# EAGLE board lul (EAGLE 8.2.2)
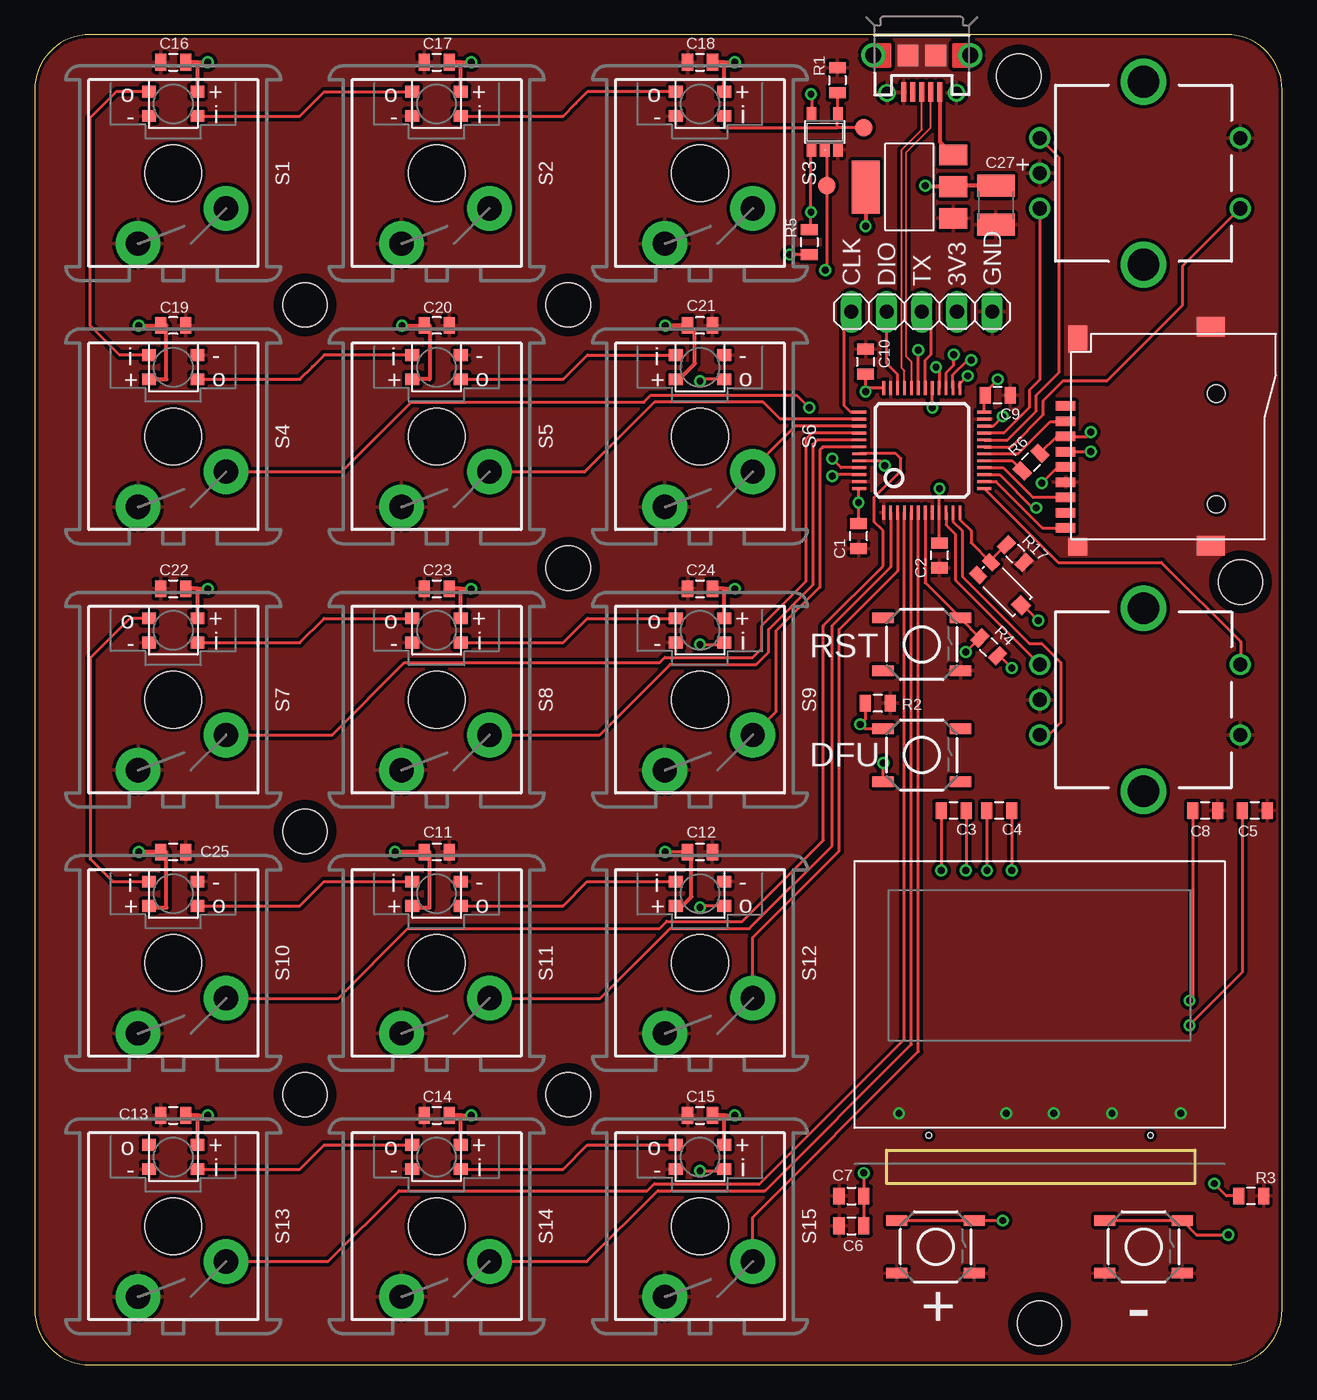
[diagram p0: board, top side]
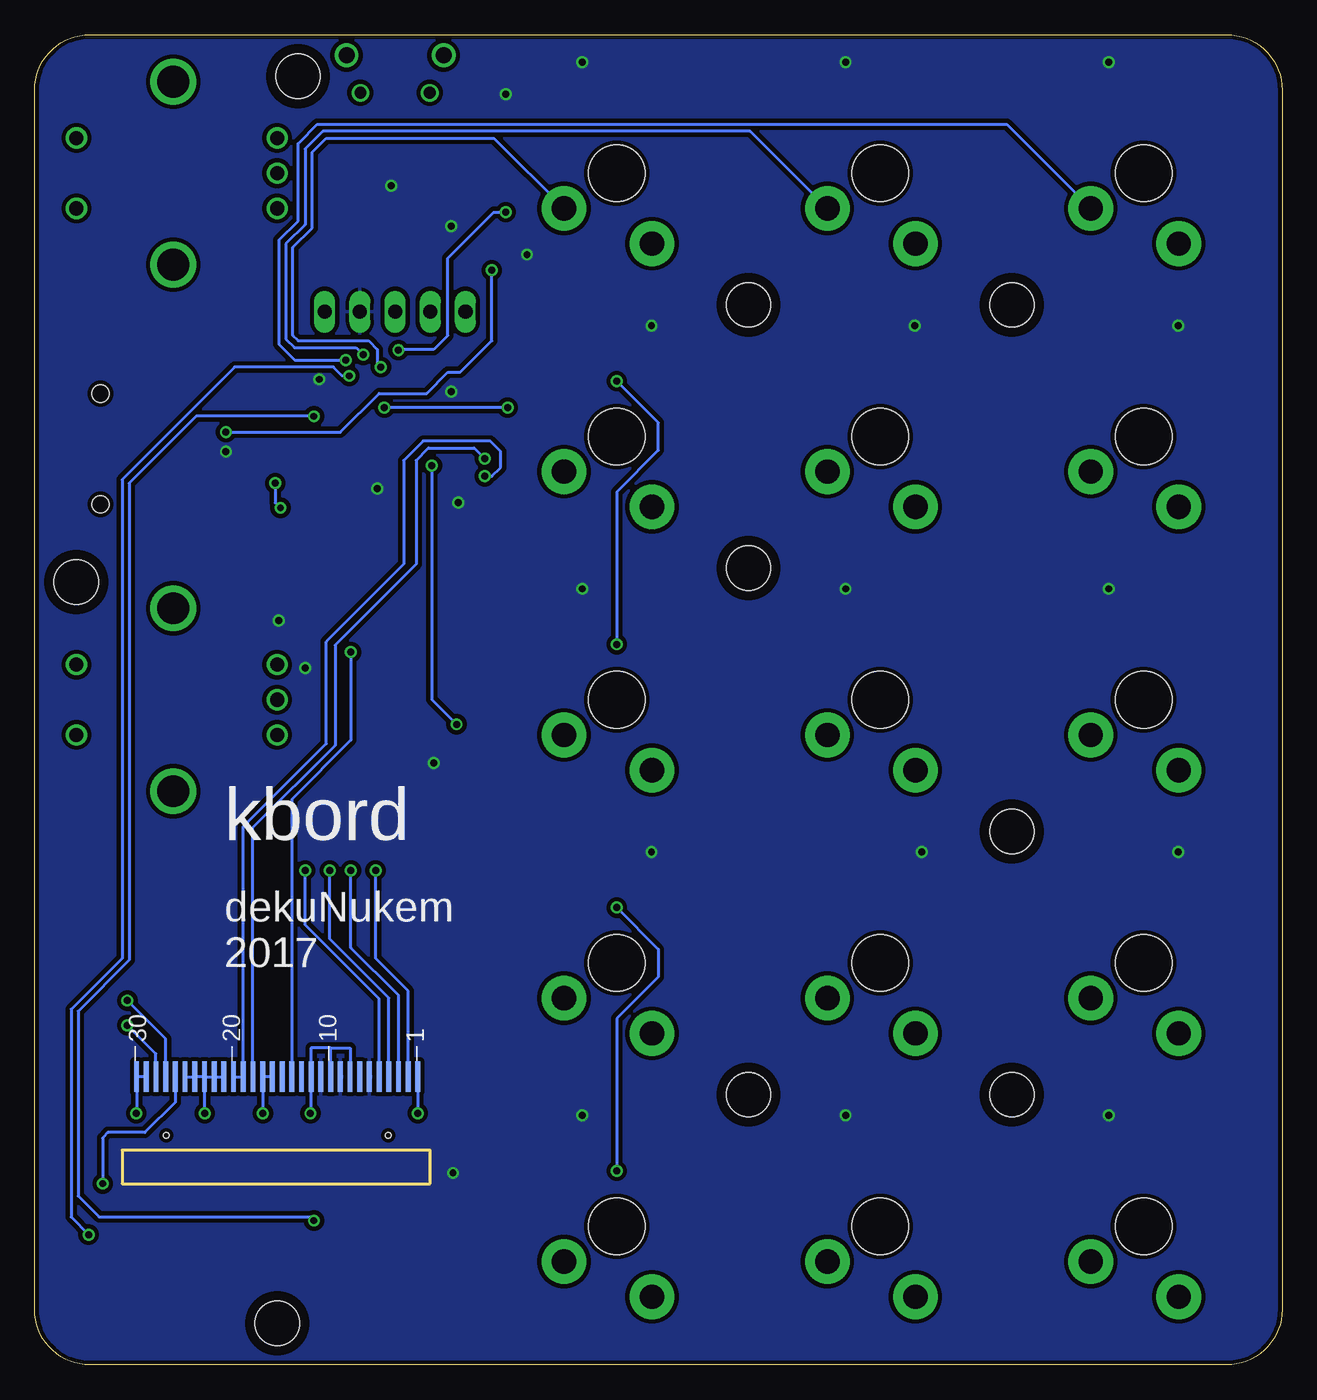
[diagram p1: board, bottom side, seen from below]

Size 90 x 96 mm. Coordinates in mm from the lower left corner, seen from the top.
Outline: 0,92 0,4 arc90 4,0 86,0 arc90 90,4 90,92 arc90 86,96 4,96 arc90 0,92
Copper layers (1*16): Top 0.035mm / dielectric 1.5mm / Bottom 0.035mm
Design rules "SparkFun-2-layer-TIGHT": minimum track width 7mil, minimum drill 15mil, track to track 7mil, track to pad 7mil, pad to pad 7mil, via to via 7mil, smd to smd 7mil, copper to edge 7mil, drill to drill 7mil, minimum pad ring 7mil, minimum via ring 7mil, stop-mask expansion 4mil, vias tented up to drill 25mil, thermal gap 10mil
Milling: area 61.5,13.1 to 83.7,15.5

## Footprints (pad centres in the part's own frame; a part is rotated, then mirrored left to right if it is on the bottom)
0805@1 = smd 0.8 x 1.2: 1 -0.9,0; 2 0.9,0
C1210 = smd 1.6 x 2.7: 1 -1.4,0; 2 1.4,0
TQFP48 = smd 0.2 x 1: 1 -2.75,-4.5; 2 -2.25,-4.5; 3 -1.75,-4.5; 4 -1.25,-4.5; 5 -0.75,-4.5; 6 -0.25,-4.5; 7 0.25,-4.5; 8 0.75,-4.5; 9 1.25,-4.5; 10 1.75,-4.5; 11 2.25,-4.5; 12 2.75,-4.5; 25 2.75,4.5; 26 2.25,4.5; 27 1.75,4.5; 28 1.25,4.5; 29 0.75,4.5; 30 0.25,4.5; 31 -0.25,4.5; 32 -0.75,4.5; 33 -1.25,4.5; 34 -1.75,4.5; 35 -2.25,4.5; 36 -2.75,4.5 | smd 1 x 0.2: 13 4.5,-2.75; 14 4.5,-2.25; 15 4.5,-1.75; 16 4.5,-1.25; 17 4.5,-0.75; 18 4.5,-0.25; 19 4.5,0.25; 20 4.5,0.75; 21 4.5,1.25; 22 4.5,1.75; 23 4.5,2.25; 24 4.5,2.75; 37 -4.5,2.75; 38 -4.5,2.25; 39 -4.5,1.75; 40 -4.5,1.25; 41 -4.5,0.75; 42 -4.5,0.25; 43 -4.5,-0.25; 44 -4.5,-0.75; 45 -4.5,-1.25; 46 -4.5,-1.75; 47 -4.5,-2.25; 48 -4.5,-2.75
SOT223 = smd 1.499 x 2.007: 1 -2.261,-3.15; 2 0.025,-3.15; 3 2.311,-3.15 | smd 3.81 x 2.007: 4 0,3.15
SOT23-5 = smd 0.69 x 0.99: 1 -0.95,-1.29; 2 0,-1.29; 3 0.95,-1.29; 4 0.95,1.3; 5 -0.95,1.3
1X05 = drill 1.016 long: 1 -5.08,0; 2 -2.54,0; 3 0,0; 4 2.54,0; 5 5.08,0
LED3535 = smd 1 x 0.85: 1 -1.75,0.875; 2 -1.75,-0.875; 3 1.75,-0.875; 4 1.75,0.875
0805 = smd 0.8 x 1.2: 1 -0.9,0; 2 0.9,0
CHERRY-MX-LED = drill 1.753 pad 3.226: S1 -3.81,2.54; S2 2.54,5.08 | hole 4.089: 0,0
ROTARY_ENC_PLAIN = drill 1.016: A 7.493,-2.54; B 7.493,2.54; C 7.493,0; SW+ -6.985,2.54; SW- -6.985,-2.54 | drill 2.286: P$3 0,6.604; P$4 0,-6.604
TACTILE-SWITCH-SMD = smd 1.524 x 0.762: 1 -2.794,1.905; 2 2.794,1.905; 3 -2.794,-1.905; 4 2.794,-1.905
TF-PULL = smd 0.7 x 1.4: 1 -2.2,-7.62; 2 -1.1,-7.62; 3 0,-7.62; 4 1.1,-7.62; 5 2.2,-7.62; 6 3.3,-7.62; 7 4.4,-7.62; 8 5.5,-7.62; 9 6.6,-7.62 | smd 1.4 x 2: S1 -7.9,2.85; S2 7.9,2.85 | smd 1.28 x 1.4: S3 7.96,-6.75 | smd 1.95 x 1.4: S4 -7.025,-6.75 | hole 1.25: -3.1,3.25; 4.9,3.25
PAD.03X.05 = smd 1.27 x 1.27: P$1 0,0
UG-2864HSWEG01_0.96IN_WRAPAROUND = smd 0.35 x 2.2 bottom: 1 -10.15,-1.2; 2 -9.45,-1.2; 3 -8.75,-1.2; 4 -8.05,-1.2; 5 -7.35,-1.2; 6 -6.65,-1.2; 7 -5.95,-1.2; 8 -5.25,-1.2; 9 -4.55,-1.2; 10 -3.85,-1.2; 11 -3.15,-1.2; 12 -2.45,-1.2; 13 -1.75,-1.2; 14 -1.05,-1.2; 15 -0.35,-1.2; 16 0.35,-1.2; 17 1.05,-1.2; 18 1.75,-1.2; 19 2.45,-1.2; 20 3.15,-1.2; 21 3.85,-1.2; 22 4.55,-1.2; 23 5.25,-1.2; 24 5.95,-1.2; 25 6.65,-1.2; 26 7.35,-1.2; 27 8.05,-1.2; 28 8.75,-1.2; 29 9.45,-1.2; 30 10.15,-1.2 | hole 0.4: -8,-5.45; 8,-5.45
M3_MOUNTING_HOLE_PACK = hole 3.2: 0,0
TEMT6000-SEN = smd 1.1 x 0.8: BASE -1.87,-0.65; EMITTER -1.87,0.65 | smd 1.1 x 1: COLLECTOR 1.86,0.01
USB-MICROB = smd 0.35 x 1.4: D+ 0,2.65; D- -0.65,2.65; GND 1.3,2.65; ID 0.65,2.65; VBUS -1.3,2.65 | smd 1.5 x 1.55: P1 -1,0; P2 1,0 | drill 1.15 pad 1.422: P3 -3.5,0; P4 3.5,0 | drill 0.85 pad 1.27: P5 -2.5,2.7; P6 2.5,2.7

## Placement (x,y rotation side)
C1  0.1uF  [0805@1]  59.44,59.82 90 top
C2  0.1uF  [0805@1]  65.28,58.42 90 top
C3  2.2uF  [0805@1]  66.29,40.01 180 top
C4  2.2uF  [0805@1]  69.6,40.01 180 top
C5  10uF  [0805@1]  88.01,40.01 180 top
C6  2.2uF  [0805@1]  58.93,10.03 0 top
C7  2.2uF  [0805@1]  58.93,12.19 0 top
C8  2.2uF/16V  [0805@1]  84.45,40.01 180 top
C9  0.1uF  [0805@1]  69.47,69.98 180 top
C10  0.1uF  [0805@1]  59.94,72.39 270 top
C11  0.1uF  [0805@1]  29,37.01 180 top
C12  0.1uF  [0805@1]  48,37.01 180 top
C13  0.1uF  [0805@1]  10,18.01 0 top
C14  0.1uF  [0805@1]  29,18.01 0 top
C15  0.1uF  [0805@1]  48,18.01 0 top
C16  0.1uF  [0805@1]  10,94.01 0 top
C17  0.1uF  [0805@1]  29,94.01 0 top
C18  0.1uF  [0805@1]  48,94.01 0 top
C19  0.1uF  [0805@1]  10,75.01 180 top
C20  0.1uF  [0805@1]  29,75.01 180 top
C21  0.1uF  [0805@1]  48,75.01 180 top
C22  0.1uF  [0805@1]  10,56.01 0 top
C23  0.1uF  [0805@1]  29,56.01 0 top
C24  0.1uF  [0805@1]  48,56.01 0 top
C25  0.1uF  [0805@1]  10,37.01 180 top
C27  [C1210]  69.34,83.69 270 top
IC1  STM32F072C8T6  [TQFP48]  64,66 0 top
IC2  REG1117  [SOT223]  63.11,85 90 top
IC3  74LVC1G125DBV  [SOT23-5]  57,88.98 0 top
JP1  [1X05]  64,76 0 top
LED1  WS2812B3535  [LED3535]  10,91 180 top
LED2  WS2812B3535  [LED3535]  29,91 180 top
LED3  WS2812B3535  [LED3535]  48,91 180 top
LED4  WS2812B3535  [LED3535]  10,72 0 top
LED5  WS2812B3535  [LED3535]  29,72 0 top
LED6  WS2812B3535  [LED3535]  48,72 0 top
LED7  WS2812B3535  [LED3535]  10,53 180 top
LED8  WS2812B3535  [LED3535]  29,53 180 top
LED9  WS2812B3535  [LED3535]  48,53 180 top
LED10  WS2812B3535  [LED3535]  10,34 0 top
LED11  WS2812B3535  [LED3535]  29,34 0 top
LED12  WS2812B3535  [LED3535]  48,34 0 top
LED13  WS2812B3535  [LED3535]  10,15 180 top
LED14  WS2812B3535  [LED3535]  29,15 180 top
LED15  WS2812B3535  [LED3535]  48,15 180 top
R1  10k  [0805]  57.91,92.71 270 top
R2  10k  [0805]  60.83,47.75 180 top
R3  390K  [0805]  87.76,12.19 180 top
R4  10k  [0805]  68.83,51.82 315 top
R5  10k  [0805]  55.88,81.03 270 top
R6  300  [0805]  71.88,65.15 45 top
R17  [0805]  70.74,58.55 135 top
S1  MOMENTARY-SWITCH-SPST-LED-PTH-CHERRY  [CHERRY-MX-LED]  10,86 180 top
S2  MOMENTARY-SWITCH-SPST-LED-PTH-CHERRY  [CHERRY-MX-LED]  29,86 180 top
S3  MOMENTARY-SWITCH-SPST-LED-PTH-CHERRY  [CHERRY-MX-LED]  48,86 180 top
S4  MOMENTARY-SWITCH-SPST-LED-PTH-CHERRY  [CHERRY-MX-LED]  10,67 180 top
S5  MOMENTARY-SWITCH-SPST-LED-PTH-CHERRY  [CHERRY-MX-LED]  29,67 180 top
S6  MOMENTARY-SWITCH-SPST-LED-PTH-CHERRY  [CHERRY-MX-LED]  48,67 180 top
S7  MOMENTARY-SWITCH-SPST-LED-PTH-CHERRY  [CHERRY-MX-LED]  10,48 180 top
S8  MOMENTARY-SWITCH-SPST-LED-PTH-CHERRY  [CHERRY-MX-LED]  29,48 180 top
S9  MOMENTARY-SWITCH-SPST-LED-PTH-CHERRY  [CHERRY-MX-LED]  48,48 180 top
S10  MOMENTARY-SWITCH-SPST-LED-PTH-CHERRY  [CHERRY-MX-LED]  10,29 180 top
S11  MOMENTARY-SWITCH-SPST-LED-PTH-CHERRY  [CHERRY-MX-LED]  29,29 180 top
S12  MOMENTARY-SWITCH-SPST-LED-PTH-CHERRY  [CHERRY-MX-LED]  48,29 180 top
S13  MOMENTARY-SWITCH-SPST-LED-PTH-CHERRY  [CHERRY-MX-LED]  10,10 180 top
S14  MOMENTARY-SWITCH-SPST-LED-PTH-CHERRY  [CHERRY-MX-LED]  29,10 180 top
S15  MOMENTARY-SWITCH-SPST-LED-PTH-CHERRY  [CHERRY-MX-LED]  48,10 180 top
S16  ENCODER-SWITCH  [ROTARY_ENC_PLAIN]  80,48 180 top
S17  ENCODER-SWITCH  [ROTARY_ENC_PLAIN]  80,86 180 top
S19  TAC_SWITCHSMD  [TACTILE-SWITCH-SMD]  80,8.52 0 top
S20  TAC_SWITCHSMD  [TACTILE-SWITCH-SMD]  65,8.52 0 top
S21  TAC_SWITCHSMD  [TACTILE-SWITCH-SMD]  64,52 0 top
S22  TAC_SWITCHSMD  [TACTILE-SWITCH-SMD]  64,44 0 top
SD1  TF-HOLDER  [TF-PULL]  82,67 270 top
TP1  TEST-POINT3X5  [PAD.03X.05]  59.82,89.28 90 top
TP2  TEST-POINT3X5  [PAD.03X.05]  57.15,85.09 0 top
U1  UG-2864HSWEG01  [UG-2864HSWEG01_0.96IN_WRAPAROUND]  72.5,22 0 top
U$7  M3_MOUNTING_HOLE  [M3_MOUNTING_HOLE_PACK]  19.5,19.5 0 top
U$8  TEMT6000  [TEMT6000-SEN]  69.85,56.13 315 top
U$9  M3_MOUNTING_HOLE  [M3_MOUNTING_HOLE_PACK]  87,56.5 0 top
U$10  M3_MOUNTING_HOLE  [M3_MOUNTING_HOLE_PACK]  71,93 0 top
U$11  M3_MOUNTING_HOLE  [M3_MOUNTING_HOLE_PACK]  19.5,76.5 0 top
U$12  M3_MOUNTING_HOLE  [M3_MOUNTING_HOLE_PACK]  38.5,19.5 0 top
U$13  M3_MOUNTING_HOLE  [M3_MOUNTING_HOLE_PACK]  38.5,76.5 0 top
U$14  M3_MOUNTING_HOLE  [M3_MOUNTING_HOLE_PACK]  72.5,3 0 top
U$15  M3_MOUNTING_HOLE  [M3_MOUNTING_HOLE_PACK]  38.5,57.5 0 top
U$16  M3_MOUNTING_HOLE  [M3_MOUNTING_HOLE_PACK]  19.5,38.5 0 top
X1  USB-MICROB  [USB-MICROB]  64,94.5 180 top

## Library data of the parts
C1-C25 C27 IC1 R1-R6 R17 SD1 TP1 TP2 U$7 U$9-U$16 = clock
IC2 = clock; MPN: REG1117; OC_FARNELL: 1097566; OC_NEWARK: 14P6981
IC3 = 74xx-little-de
JP1 = pinhead
LED1-LED15 U1 = lul
S1-S15 = lul; SF_ID: COM-13834
S16 S17 = SparkFun-Switches; SF_SKU: COM-09117
S19-S22 = clock; PROD_ID: SWCH-08247
U$8 = ProtoSnap-v14a
X1 = clock; PROD_ID: CONN-09505

## Nets
+3V3: C1.2 C2.2 C6.2 C7.2 C9.2 C10.2 C11.2 C12.2 C13.2 C14.2 C15.2 C16.2 C17.2 C18.2 C19.2 C20.2 C21.2 C22.2 C23.2 C24.2 C25.2 C27.1 IC1.9 IC1.24 IC1.36 IC1.48 IC2.2 IC2.4 IC3.5 JP1.4 LED1.2 LED2.2 LED3.2 LED4.2 LED5.2 LED6.2 LED7.2 LED8.2 LED9.2 LED10.2 LED11.2 LED12.2 LED13.2 LED14.2 LED15.2 R4.2 R5.2 S22.3 SD1.4 U1.6 U1.9 U1.11 U$8.COLLECTOR
BUTTON1: IC1.25 S19.1 S19.2
BUTTON2: IC1.22 S20.1 S20.2
E1_SW: IC1.19 S17.SW+
E1A: IC1.20 S17.A
E1B: IC1.21 S17.B
E2_SW: IC1.13 S16.SW-
E2A: IC1.10 S16.A
E2B: IC1.11 S16.B
GND: C1.1 C2.1 C5.1 C6.1 C7.1 C8.1 C9.1 C10.1 C11.1 C12.1 C13.1 C14.1 C15.1 C16.1 C17.1 C18.1 C19.1 C20.1 C21.1 C22.1 C23.1 C24.1 C25.1 C27.2 IC1.1 IC1.8 IC1.23 IC1.35 IC1.47 IC2.1 IC3.3 JP1.5 LED1.4 LED2.4 LED3.4 LED4.4 LED5.4 LED6.4 LED7.4 LED8.4 LED9.4 LED10.4 LED11.4 LED12.4 LED13.4 LED14.4 LED15.4 R1.1 R2.1 R3.1 R17.1 S1.S2 S2.S2 S3.S2 S4.S2 S5.S2 S6.S2 S7.S2 S8.S2 S9.S2 S10.S2 S11.S2 S12.S2 S13.S2 S14.S2 S15.S2 S16.C S16.SW+ S17.C S17.SW- S19.3 S19.4 S20.3 S20.4 S21.4 SD1.6 SD1.S1 SD1.S2 SD1.S3 SD1.S4 U1.1 U1.8 U1.10 U1.12 U1.16 U1.17 U1.21 U1.22 U1.23 U1.24 U1.25 U1.29 U1.30 X1.GND X1.P1 X1.P2 X1.P3 X1.P4 X1.P5 X1.P6
LED_DATA_EN: IC1.31 IC3.1 R5.1
LIGHT_SENSOR_OUTPUT: IC1.12 R17.2 U$8.EMITTER
N$1: IC2.3 X1.VBUS
N$2: IC1.44 R2.2 S22.1
N$3: R3.2 U1.26
N$4: C3.2 U1.2
N$5: C3.1 U1.3
N$6: C4.2 U1.4
N$7: C4.1 U1.5
N$8: IC1.15 SD1.5
N$9: LED2.1 LED3.3
N$10: IC1.16 SD1.7
N$11: C5.2 U1.28
N$12: C8.2 U1.27
N$14: IC1.14 SD1.9
N$15: LED1.1 LED2.3
N$16: IC1.17 R6.1
N$17: LED1.3 LED4.1
N$18: LED4.3 LED5.1
N$19: LED5.3 LED6.1
N$20: LED6.3 LED9.1
N$21: LED8.1 LED9.3
N$22: LED7.1 LED8.3
N$23: LED7.3 LED10.1
N$24: LED10.3 LED11.1
N$25: LED11.3 LED12.1
N$26: LED12.3 LED15.1
N$27: LED14.1 LED15.3
N$28: LED13.1 LED14.3
N$29: IC3.4 LED3.1 R1.2 TP1.P$1
N$32: IC1.37 JP1.1
N$34: IC1.34 JP1.2
RST: IC1.7 R4.1 S21.2 U1.14
SCL: IC1.45 U1.18
SD_CS: IC1.18 SD1.2
SDA: IC1.46 U1.19 U1.20
SPI_MOSI: IC3.2 R6.2 SD1.3 TP2.P$1
SW1: IC1.26 S1.S1
SW2: IC1.27 S2.S1
SW3: IC1.28 S3.S1
SW4: IC1.29 S4.S1
SW5: IC1.38 S5.S1
SW6: IC1.39 S6.S1
SW7: IC1.40 S7.S1
SW8: IC1.41 S8.S1
SW9: IC1.42 S9.S1
SW10: IC1.43 S10.S1
SW11: IC1.2 S11.S1
SW12: IC1.3 S12.S1
SW13: IC1.4 S13.S1
SW14: IC1.5 S14.S1
SW15: IC1.6 S15.S1
UART1_TX: IC1.30 JP1.3
USB_DN: IC1.32 X1.D-
USB_DP: IC1.33 X1.D+

## Tracks (layer width: path | path; a pad name or v marks a point on that pad's centre or on a via)
+3V3  (via drill 0.5)
  Top 0.203: C2.2 65.25,59.35 IC1.9 65.25,63.22 v65.28,63.25 | IC1.24 68.5,69.91 C9.2 68.57,70.22 v69.47,71.12 | C10.2 v59.94,70.23 60.21,70.5 IC1.36 | C1.2 v59.44,62.23 59.44,63.19 IC1.48 | U$8.COLLECTOR 71.28,54.83 v72.39,53.72 | R4.2 69.6,51.18 v70.48,50.29 | SD1.4 76.19,65.9 v76.2,65.91 | S22.3 61.21,42.1 v61.21,43.43 | R5.2 v54.48,80.14 | v56.01,91.69 56.05,91.65 IC3.5 | C12.2 v45.5,37.01 | C6.2 C7.2 59.82,12.2 v59.82,13.84
  Top 0.305: 11.75,18.01 C13.2 | 11.75,18.01 v12.5,18.01 | LED13.2 11.75,18.01 | 30.75,18.01 C14.2 | 30.75,18.01 v31.5,18.01 | LED14.2 30.75,18.01 | 49.75,18.01 C15.2 | 49.75,18.01 v50.5,18.01 | LED15.2 49.75,18.01 | v7.5,75.01 C19.2 9.5,75.01 9.5,71.12 LED4.2 | v26.5,75.01 C20.2 28.5,75.01 28.5,71.12 LED5.2 | v45.5,75.01 C21.2 47.62,74.48 47.62,72.26 46.49,71.12 LED6.2 | LED12.2 46.71,33.12 47.37,33.78 47.37,36.74 C12.2 | v7.5,37.01 C25.2 9.5,37.01 9.5,33 8.25,33 LED10.2 | v26,37.01 C11.2 28.5,37.01 28.5,33 27.25,33 LED11.2 | 11.75,94.01 C16.2 | 11.75,94.01 v12.5,94.01 | LED1.2 11.75,94.01 | 30.75,94.01 C17.2 | 30.75,94.01 v31.5,94.01 | LED2.2 30.75,94.01 | 49.75,94.01 C18.2 | 49.75,94.01 v50.5,94.01 | LED3.2 49.75,94.01 | 11.75,56.01 C22.2 | 11.75,56.01 v12.5,56.01 | LED7.2 11.75,56.01 | 30.75,56.01 C23.2 | 30.75,56.01 v31.5,56.01 | LED8.2 30.75,56.01 | 49.75,56.01 C24.2 | 49.75,56.01 v50.5,56.01 | LED9.2 49.75,56.01 | IC2.4 59.96,82.19 v59.94,82.17 | C27.1 66.33,85.09 IC2.2 64.33,85.03 v64.26,85.09
  pour Bottom (isolate 0.305): 0,96.01 0,0 90.04,0 90.04,96.01
BUTTON1  (via drill 0.5)
  Top 0.203: S19.1 S19.2 83.82,9.4 v86.11,9.4 | IC1.25 66.75,70.81 v67.31,71.37
  Bottom 0.203: v67.31,71.37 67.82,71.37 68.45,72.01 75.56,72.01 83.69,63.88 83.69,29.34 87.38,25.65 87.38,10.67 v86.11,9.4
BUTTON2  (via drill 0.5)
  Top 0.203: IC1.22 69.15,67.75 v69.85,68.45 | S20.1 S20.2 v69.84,10.42 v69.85,10.41
  Bottom 0.203: v69.85,68.45 78.36,68.45 83.19,63.63 83.19,29.21 86.87,25.53 86.87,12.19 85.34,10.67 70.1,10.67 v69.85,10.41
E1_SW
  Top 0.203: IC1.19 70.44,66.25 72.77,68.58 72.77,69.6 74.17,70.99 77.34,70.99 82.8,76.45 82.8,79.28 S17.SW+
E1A
  Top 0.203: IC1.20 70.18,66.75 72.26,68.83 72.26,69.98 73.91,71.63 73.91,87.13 S17.A
E1B
  Top 0.203: S17.B 72.52,71.12 71.75,70.36 71.75,69.09 69.92,67.25 IC1.21
E2_SW
  Top 0.203: IC1.13 73.84,57.91 81.28,57.91 87,52.2 87,50.55 S16.SW-
E2A
  Top 0.203: S16.A 72.51,50.56 66.42,56.64 66.42,59.94 65.75,60.62 IC1.10
E2B
  Top 0.203: S16.B 73.15,45.46 74.04,46.35 74.04,50.67 72.64,52.07 71.75,52.07 66.93,56.9 66.93,60.2 66.25,60.88 IC1.11
GND  (via drill 0.5)
  Bottom 0.203: U1.1 v62.35,18.17 v62.36,18.16 | v70.1,18.16 70.05,18.21 U1.12 70.05,22.86 68.65,22.86 | v82.68,18.16 82.65,18.19 U1.30 U1.29 | U1.8 67.25,22.86 68.65,22.86 | U1.10 68.65,22.86 | U1.25 U1.24 U1.23 | U1.23 U1.22 U1.21 | U1.16 U1.17 73.55,18.18 v73.53,18.16 | v77.72,18.16 77.72,20.77 U1.23
  pour Top (isolate 0.254): 0,96 0,0 90,0 90,96
LED_DATA_EN  (via drill 0.5)
  Top 0.203: IC3.1 56.01,87.65 v56.01,83.19 56.01,82.05 R5.1 | IC1.31 v63.75,73.22 v63.75,73.23
  Bottom 0.203: v63.75,73.23 63.7,73.28 61.21,73.28 60.2,74.3 60.2,79.88 56.9,83.19 v56.01,83.19
LIGHT_SENSOR_OUTPUT
  Top 0.203: R17.2 68.99,58.07 U$8.EMITTER 67.56,59.34 67.56,60.2 66.75,61.01 IC1.12
N$1
  Top 0.305: X1.VBUS 65.3,88.27 IC2.3
N$2  (via drill 0.5)
  Top 0.203: IC1.44 60.99,65.25 v61.34,64.9 | S22.1 59.89,45.91 v59.56,46.23 59.93,46.6 R2.2
  Bottom 0.203: v61.34,64.9 61.34,48.01 v59.56,46.23
N$3  (via drill 0.5)
  Top 0.203: R3.2 85.98,12.19 v85.09,13.08
  Bottom 0.203: v85.09,13.08 85.09,16.38 84.71,16.76 82.04,16.76 79.85,18.96 U1.26
N$4  (via drill 0.5)
  Top 0.203: C3.2 65.39,35.7 v65.41,35.69
  Bottom 0.203: U1.2 63.05,26.98 65.41,29.34 v65.41,35.69
N$5  (via drill 0.5)
  Top 0.203: C3.1 67.19,35.7 v67.18,35.69
  Bottom 0.203: U1.3 63.75,26.67 67.18,30.1 v67.18,35.69
N$6  (via drill 0.5)
  Top 0.203: C4.2 68.7,35.7 v68.71,35.69
  Bottom 0.203: U1.4 64.45,26.48 68.71,30.73 v68.71,35.69
N$7  (via drill 0.5)
  Top 0.203: C4.1 70.5,35.7 v70.48,35.69
  Bottom 0.203: U1.5 65.15,26.41 70.48,31.75 v70.48,35.69
N$8  (via drill 0.5)
  Top 0.203: SD1.5 73.82,64.8 v72.64,63.63 | v72.26,61.85 72.01,61.85 69.61,64.25 IC1.15
  Bottom 0.203: v72.64,63.63 72.64,62.23 v72.26,61.85
N$9
  Top 0.203: LED3.3 39.88,91.88 39.05,91.05 | 39.05,91.05 39,91 | LED2.1 38.12,90.12 39.05,91.05
N$10
  Top 0.203: IC1.16 69.87,64.75 72.01,62.61 SD1.7
N$11  (via drill 0.5)
  Top 0.203: C5.2 87.11,28.31 v83.31,24.51
  Bottom 0.203: U1.28 81.25,22.45 v83.31,24.51
N$12  (via drill 0.5)
  Top 0.203: C8.2 83.56,26.53 v83.31,26.29
  Bottom 0.203: U1.27 80.55,23.53 v83.31,26.29
N$14
  Top 0.203: SD1.9 72.7,60.4 69.35,63.75 IC1.14
N$15
  Top 0.203: LED2.3 20.88,91.88 19.12,90.12 LED1.1
N$16
  Top 0.203: IC1.17 70.51,65.25 R6.1
N$17
  Top 0.203: LED1.3 5.88,91.88 4,90 4,75 6.12,72.88 LED4.1
N$18
  Top 0.203: LED5.1 20.88,72.88 20.05,72.05 | 20.05,72.05 20,72 | LED4.3 19.12,71.12 20.05,72.05
N$19
  Top 0.203: LED6.1 39.88,72.88 38.12,71.12 LED5.3
N$20  (via drill 0.5)
  Top 0.203: v48,52 49.62,52 LED9.1 | LED6.3 48.12,71.12 v48,71
  Bottom 0.203: v48,52 48,63 45,66 45,68 v48,71
N$21
  Top 0.203: LED9.3 39.88,53.88 38.12,52.12 LED8.1
N$22
  Top 0.203: LED8.3 20.88,53.88 19.12,52.12 LED7.1
N$23
  Top 0.203: LED7.3 6.88,53.88 4,51 4,36.5 5.62,34.88 LED10.1
N$24
  Top 0.203: LED11.1 20.88,34.88 19.12,33.12 LED10.3
N$25
  Top 0.203: LED12.1 39.88,34.88 38.12,33.12 LED11.3
N$26  (via drill 0.5)
  Top 0.203: LED12.3 48.12,33.12 v48,33 | v48,14 49.62,14 LED15.1
  Bottom 0.203: v48,33 45,30 45,28 48,25 v48,14
N$27
  Top 0.203: LED15.3 39.88,15.88 38.12,14.12 LED14.1
N$28
  Top 0.203: LED14.3 20.88,15.88 19.12,14.12 LED13.1
N$29
  Top 0.203: LED3.1 49.75,89.28 57.91,89.28 57.91,89.29 | 57.91,89.29 57.91,90.28 IC3.4 57.95,91.81 R1.2 | TP1.P$1 57.92,89.28 57.91,89.29
N$32
  Top 0.203: IC1.37 58.88,68.75 58.42,69.22 58.42,75.5 JP1.1
N$34
  Top 0.203: IC1.34 62.25,71.48 61.47,72.26 JP1.2
RST  (via drill 0.5)
  Top 0.203: IC1.7 64.25,56.45 S21.2 66.79,53.86 R4.1 v67.18,51.44
  Bottom 0.203: U1.14 71.45,40.82 67.18,45.09 v67.18,51.44
SCL  (via drill 0.5)
  Top 0.203: v57.53,65.41 58.19,64.75 IC1.45
  Bottom 0.203: v57.53,65.41 58.29,66.17 61.59,66.17 62.48,65.28 62.48,57.78 68.33,51.94 68.33,44.7 74.3,38.73 74.3,20.84 U1.18
SD_CS
  Top 0.203: IC1.18 70.96,65.75 73.28,68.07 74.35,68.07 SD1.2
SDA  (via drill 0.5)
  Top 0.203: IC1.46 57.65,64.25 v57.53,64.14
  Bottom 0.203: U1.20 U1.19 74.95,38.84 68.96,44.83 68.96,52.2 63.37,57.78 63.37,65.28 61.98,66.67 57.15,66.67 56.39,65.91 56.39,64.77 57.02,64.14 v57.53,64.14
SPI_MOSI  (via drill 0.5)
  Top 0.203: R6.2 73.73,67 SD1.3 75.89,67 v76.2,67.31 | 57.02,87.66 IC3.2 57.15,87.53 TP2.P$1 57.15,79.12 v57.02,78.99
  Bottom 0.203: v76.2,67.31 67.94,67.31 65.15,70.1 61.72,70.1 60.2,71.63 59.31,71.63 57.02,73.91 v57.02,78.99
SW1  (via drill 0.5)
  Top 0.203: IC1.26 66.25,71.46 67.31,72.52 v67.56,72.52
  Bottom 0.203: v67.56,72.52 71.25,72.52 72.39,73.66 72.39,81.15 70.99,82.55 70.99,88.14 69.6,89.53 19.89,89.53 S1.S1
SW2  (via drill 0.5)
  Top 0.203: IC1.27 65.75,71.59 66.29,72.14 v66.29,72.9
  Bottom 0.203: v66.29,72.9 66.8,73.41 71.25,73.41 71.88,74.04 71.88,80.9 70.48,82.3 70.48,87.76 69.22,89.03 38.38,89.03 S2.S1
SW3  (via drill 0.5)
  Top 0.203: v65.02,72.01 65.25,71.78 IC1.28
  Bottom 0.203: v65.02,72.01 65.28,72.26 65.28,73.28 65.91,73.91 70.99,73.91 71.37,74.3 71.37,80.64 69.98,82.04 69.98,87.5 68.96,88.52 56.87,88.52 S3.S1
SW4  (via drill 0.5)
  Top 0.203: v64.77,69.09 64.77,70.48 IC1.29 | S4.S1 22.17,64.46 27.18,69.47 43.94,69.47 44.45,69.98 54.99,69.98 v55.88,69.09
  Bottom 0.203: v55.88,69.09 v64.77,69.09
SW5
  Top 0.203: S5.S1 39.7,64.46 44.7,69.47 52.58,69.47 53.8,68.25 IC1.38
SW6
  Top 0.203: IC1.39 54.87,67.75 51.81,64.69 S6.S1
SW7
  Top 0.203: S7.S1 21.46,45.46 26.67,50.67 45.09,50.67 45.47,51.05 51.82,51.05 52.45,51.69 52.45,53.34 55.63,56.52 55.63,66.8 56.07,67.25 IC1.40
SW8
  Top 0.203: S8.S1 40.76,45.46 45.85,50.55 52.07,50.55 52.96,51.44 52.96,53.09 56.13,56.26 56.13,66.42 56.46,66.75 IC1.41
SW9
  Top 0.203: S9.S1 53.47,47.12 53.47,52.96 56.64,56.13 56.64,66.04 56.85,66.25 IC1.42
SW10
  Top 0.203: S10.S1 21.89,26.46 26.92,31.5 45.09,31.5 45.59,32 51.05,32 56.9,37.85 56.9,53.34 61.21,57.66 61.21,60.2 60.58,60.83 60.58,62.61 62.48,64.52 62.48,65.41 62.14,65.75 IC1.43
SW11
  Top 0.203: IC1.2 61.75,57.56 57.53,53.34 57.53,37.47 51.56,31.5 45.85,31.5 40.81,26.46 S11.S1
SW12
  Top 0.203: IC1.3 62.25,57.3 58.04,53.09 58.04,37.08 51.81,30.86 S12.S1
SW13
  Top 0.203: IC1.4 62.75,23.51 52.32,13.08 44.7,13.08 44.2,12.57 26.29,12.57 21.18,7.46 S13.S1
SW14
  Top 0.203: IC1.5 63.25,23.12 52.7,12.57 44.96,12.57 39.84,7.46 S14.S1
SW15
  Top 0.203: IC1.6 63.75,22.61 51.81,10.66 S15.S1
UART1_TX
  Top 0.203: IC1.30 64.25,72.5 64.64,72.9 64.64,75.36 JP1.3
USB_DN
  Top 0.152: IC1.32 63.25,72.39 62.89,72.75 62.89,87.53 64.64,89.28 X1.D-
USB_DP
  Top 0.152: X1.D+ 64.01,89.15 62.56,87.71 62.56,71.93 62.75,71.74 IC1.33

## Text on the board
tNames: CLK | DIO | TX | 3V3 | GND | RST | DFU | + | -
bNames: kbord | dekuNukem / 2017